# EAGLE board HPCTL Board (EAGLE 9.7.0)
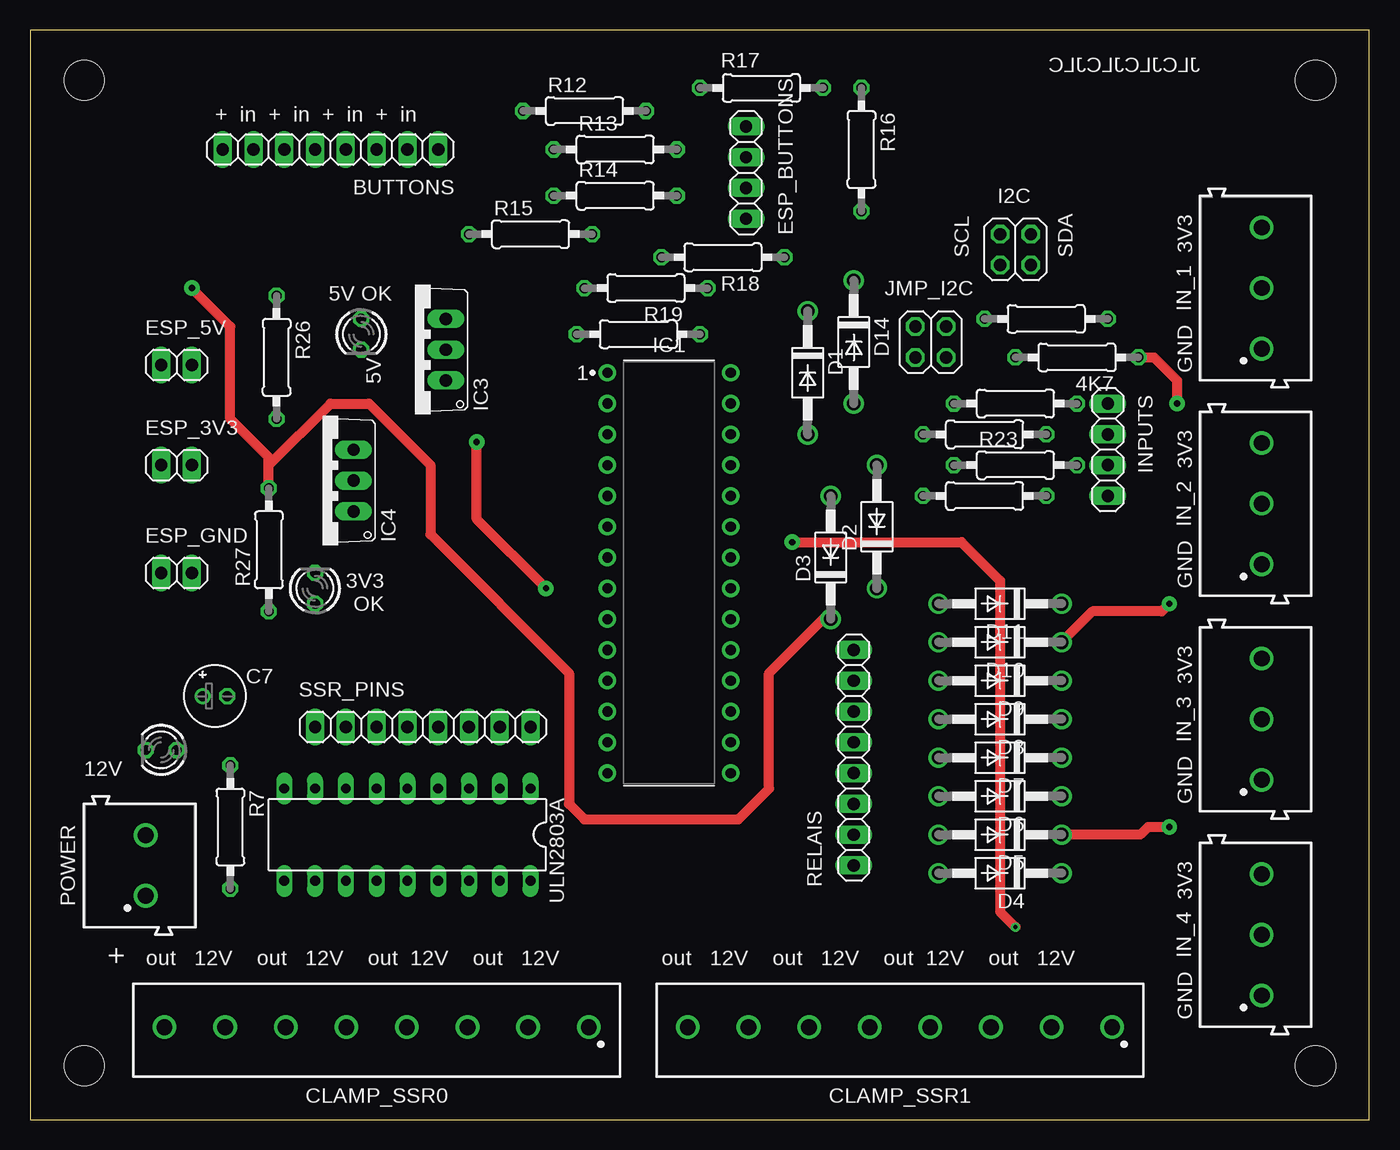
[diagram p0: board, top side]
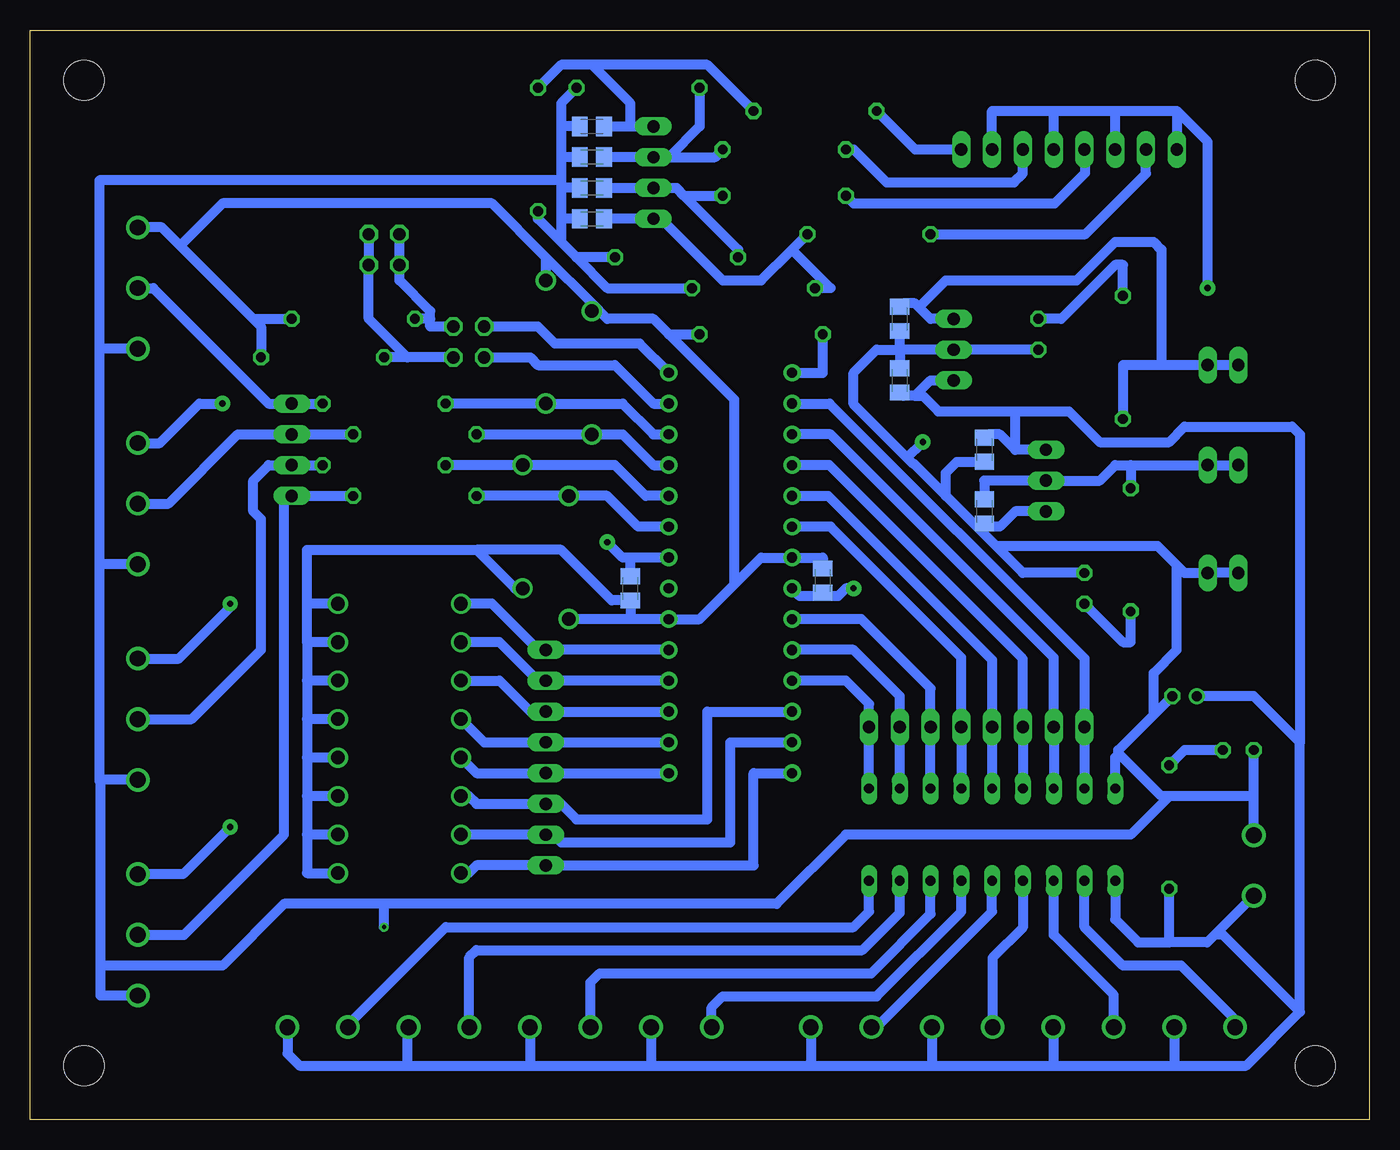
[diagram p1: board, bottom side, seen from below]

Size 110.47 x 89.84 mm. Coordinates in mm from the lower left corner, seen from the top.
Outline: 0,0 110.47,0 110.47,89.84 0,89.84 0,0
Copper layers (1*16): Top / Bottom
Stack-up Default Layer Stack: Top User Defined 0.035mm / Dielectric-1 User Defined 1.5mm / Bottom User Defined 0.035mm
Design rules "default": minimum track width 6mil, minimum drill 0.35mm, track to track 6mil, track to pad 6mil, pad to pad 6mil, via to via 6mil, smd to smd 6mil, copper to edge 40mil, drill to drill 6mil, minimum pad ring 10mil, minimum via ring 8mil, stop-mask expansion 4mil, vias tented up to drill 0mil, thermal gap 10mil
Holes 3.3 mm at 106.05,85.72 4.45,85.72 4.45,4.45 106.05,4.45

## Footprints (pad centres in the part's own frame; a part is rotated, then mirrored left to right if it is on the bottom)
0207/10 = drill 0.813 octagon: 1 -5.08,0; 2 5.08,0
LED3MM = drill 0.813 octagon: A -1.27,0; K 1.27,0
1X08 = drill 1.016 long: 1 -8.89,0; 2 -6.35,0; 3 -3.81,0; 4 -1.27,0; 5 1.27,0; 6 3.81,0; 7 6.35,0; 8 8.89,0
C0805K = smd 1.3 x 1.6: 1 -1,0; 2 1,0
E2-5 = drill 0.813 pad 1.27: + -1.016,0 | drill 0.813 pad 1.27 octagon: - 1.016,0
691135710008 = drill 1.3: 1 -17.5,0; 2 -12.5,0; 3 -7.5,0; 4 -2.5,0; 5 2.5,0; 6 7.5,0; 7 12.5,0; 8 17.5,0
DO41-10 = drill 1.118: A 5.08,0; C -5.08,0
1X02 = drill 1.016 long: 1 -1.27,0; 2 1.27,0
1X04 = drill 1.016 long: 1 -3.81,0; 2 -1.27,0; 3 1.27,0; 4 3.81,0
2X02 = drill 1.016 octagon: 1 -1.27,-1.27; 2 -1.27,1.27; 3 1.27,-1.27; 4 1.27,1.27
DIP1016W53P254L3467H457Q28B = drill 0.841 pad 1.441: 1 -5.08,16.51; 2 -5.08,13.97; 3 -5.08,11.43; 4 -5.08,8.89; 5 -5.08,6.35; 6 -5.08,3.81; 7 -5.08,1.27; 8 -5.08,-1.27; 9 -5.08,-3.81; 10 -5.08,-6.35; 11 -5.08,-8.89; 12 -5.08,-11.43; 13 -5.08,-13.97; 14 -5.08,-16.51; 15 5.08,-16.51; 16 5.08,-13.97; 17 5.08,-11.43; 18 5.08,-8.89; 19 5.08,-6.35; 20 5.08,-3.81; 21 5.08,-1.27; 22 5.08,1.27; 23 5.08,3.81; 24 5.08,6.35; 25 5.08,8.89; 26 5.08,11.43; 27 5.08,13.97; 28 5.08,16.51
TO220V = drill 1.016 long: 1 -2.54,-2.54; 2 0,-2.54; 3 2.54,-2.54
691101710003 = drill 1.3: 1 -5,0; 2 0,0; 3 5,0
691101710002 = drill 1.3: 1 -2.5,0; 2 2.5,0
DIL18 = drill 0.813 long: 1 -10.16,-3.81; 2 -7.62,-3.81; 3 -5.08,-3.81; 4 -2.54,-3.81; 5 0,-3.81; 6 2.54,-3.81; 7 5.08,-3.81; 8 7.62,-3.81; 9 10.16,-3.81; 10 10.16,3.81; 11 7.62,3.81; 12 5.08,3.81; 13 2.54,3.81; 14 0,3.81; 15 -2.54,3.81; 16 -5.08,3.81; 17 -7.62,3.81; 18 -10.16,3.81

## Placement (x,y rotation side)
4K7  [0207/10]  86.36,62.87 180 top
5V  TLLR4400  [LED3MM]  27.31,64.77 270 top
BUTTONS  PINHD-1X8  [1X08]  24.77,80.01 180 top
C1  0  [C0805K]  38.73,60.96 90 bottom
C2  0  [C0805K]  31.75,50.16 270 bottom
C3  220nF  [C0805K]  31.75,55.24 270 bottom
C4  100nF  [C0805K]  38.73,66.04 270 bottom
C5  10u  [C0805K]  64.14,81.92 0 bottom
C7  [E2-5]  15.24,34.92 0 top
C8  [C0805K]  60.96,43.81 90 bottom
C9  [C0805K]  45.09,44.45 270 bottom
C10  10u  [C0805K]  64.14,79.38 0 bottom
C11  10u  [C0805K]  64.14,76.83 180 bottom
C12  10u  [C0805K]  64.14,74.3 180 bottom
CLAMP_SSR0  691135710008  [691135710008]  28.57,7.62 180 top
CLAMP_SSR1  691135710008  [691135710008]  71.76,7.62 180 top
D1  UF4003  [DO41-10]  64.14,61.59 270 top
D2  UF4003  [DO41-10]  69.85,48.9 90 top
D3  UF4003  [DO41-10]  66.04,46.35 90 top
D4  UF4003  [DO41-10]  80.01,20.32 180 top
D5  UF4003  [DO41-10]  80.01,23.5 180 top
D6  UF4003  [DO41-10]  80.01,26.67 180 top
D7  UF4003  [DO41-10]  80.01,29.84 180 top
D8  UF4003  [DO41-10]  80.01,33.02 180 top
D9  UF4003  [DO41-10]  80.01,36.2 180 top
D10  UF4003  [DO41-10]  80.01,39.37 180 top
D11  UF4003  [DO41-10]  80.01,42.55 180 top
D14  UF4003  [DO41-10]  67.95,64.14 270 top
ESP_3V3  PINHD-1X2  [1X02]  12.07,53.98 0 top
ESP_5V  PINHD-1X2  [1X02]  12.07,62.23 0 top
ESP_BUTTONS  PINHD-1X4  [1X04]  59.06,78.11 90 top
ESP_GND  PINHD-1X2  [1X02]  12.07,45.09 0 top
I2C  PINHD-2X2  [2X02]  81.28,71.75 180 top
IC1  ATMEGA328  [DIP1016W53P254L3467H457Q28B]  52.7,45.09 0 top
IC3  LM7805_TO220V  [TO220V]  31.75,63.5 90 top
IC4  LD1117_TO220  [TO220V]  24.13,52.7 90 top
IN_1  691101710003  [691101710003]  101.6,68.58 90 top
IN_2  691101710003  [691101710003]  101.6,50.8 90 top
IN_3  691101710003  [691101710003]  101.6,33.02 90 top
IN_4  691101710003  [691101710003]  101.6,15.24 90 top
INPUTS  PINHD-1X4  [1X04]  88.9,55.24 270 top
JMP_I2C  PINHD-2X2  [2X02]  74.3,64.14 0 top
LED3  TLLR4400  [LED3MM]  23.5,43.81 90 top
LED17  TLLR4400  [LED3MM]  10.79,30.48 180 top
POWER  691101710002  [691101710002]  9.53,20.95 90 top
R7  [0207/10]  16.51,24.13 270 top
R12  1k  [0207/10]  45.72,83.19 0 top
R13  1k  [0207/10]  48.26,80.01 0 top
R14  1k  [0207/10]  48.26,76.2 0 top
R15  1k  [0207/10]  41.28,73.03 0 top
R16  10k  [0207/10]  68.58,80.01 270 top
R17  10k  [0207/10]  60.33,85.09 180 top
R18  10k  [0207/10]  57.15,71.12 180 top
R19  10k  [0207/10]  50.8,68.58 180 top
R20  4k7  [0207/10]  83.82,66.04 180 top
R22  1k  [0207/10]  78.74,51.44 0 top
R23  [0207/10]  81.28,53.98 0 top
R24  [0207/10]  78.74,56.52 0 top
R25  1k  [0207/10]  81.28,59.05 0 top
R26  [0207/10]  20.32,62.87 270 top
R27  [0207/10]  19.68,46.99 90 top
R28  10k  [0207/10]  50.17,64.77 180 top
RELAIS  PINHD-1X8  [1X08]  67.95,29.84 270 top
SSR_PINS  PINHD-1X8  [1X08]  32.39,32.38 0 top
ULN2803A  [DIL18]  31.11,23.5 180 top

## Library data of the parts
4K7 R7 R12-R20 R22-R28 = rcl; SPICEPREFIX: R
5V LED3 LED17 = led; MF: VISHAY SEMICONDUCTOR; OC_FARNELL: 1612437
BUTTONS ESP_BUTTONS I2C INPUTS JMP_I2C RELAIS SSR_PINS = Connector; CATEGORY: CONNECTOR; SUB-CATEGORY: PIN-HEADER
C1-C5 C7-C12 = rcl; SPICEPREFIX: C
CLAMP_SSR0 CLAMP_SSR1 = Wurth_Connectors_WR-TBL Wire Protector; DATASHEET-URL: https://www.we-online.com/catalog/datasheet/691135710008.pdf; IR-UL: 14A; IR-VDE: 13.5A; MOUNT: THT; PART-NUMBER: 691135710008; PINS: 8; PITCH: 5mm; TYPE: Horizontal; WIRE: 30 to 14 (AWG) 0.05 to 2.08 (mm²); WORKING-VOLTAGE-UL: 300V(AC); WORKING-VOLTAGE-VDE: 250V(AC)
D1-D11 D14 = diode
ESP_3V3 ESP_5V ESP_GND = Connector; CATEGORY: Headers; DESCRIPTION: Header, Straight, 2 Position; MANUFACTURER: Generic; MPN: Generic; OPERATING_TEMPERATURE: Generic; PART_STATUS: Active; PITCH: 0.100" (2.54mm); ROHS_COMPLIANCE: Generic; SERIES: Generic; SUB-CATEGORY: Headers, Male Pins; TYPE: Board to Board or Cable, Unshrouded, Through Hole, Straight
IC1 = IC_Embedded; CATEGORY: IC_Embedded; MANUFACTURER: Microchip Technologies; MPN: ATmega328-PN; OPERATING_TEMP: –40 to +105°C; PART_STATUS: Active; SUB-CATEGORY: Microcontroller
IC3 = IC_Power-Management; CATEGORY: IC_Linear; DESCRIPTION: 5V Voltage Regulator; MANUFACTURER: Generic; MPN: Generic; SERIES: LM7805; SUB-CATEGORY: Voltage Regulator; TYPE: 5V
IC4 = IC_Power-Management; CATEGORY: IC_Linear; DESCRIPTION: Adjustable voltage regulator; MANUFACTURER: STMicroelectronics; MPN: Generic; SERIES: LM1117; SUB-CATEGORY: Voltage Regulator; TYPE: Linear
IN_1-IN_4 = Wurth_Connectors_WR-TBL Wire Protector; DATASHEET-URL: https://www.we-online.com/catalog/datasheet/691101710003.pdf; IR-UL: 16A; IR-VDE: 16A; MOUNT: THT; PART-NUMBER: 691101710003; PINS: 3; PITCH: 5mm; TYPE: Horizontal; WIRE: 26 to 14 (AWG) 0.129 to 2.08 (mm²); WORKING-VOLTAGE-UL: 250V(AC); WORKING-VOLTAGE-VDE: 250V(AC)
POWER = Wurth_Connectors_WR-TBL Wire Protector; DATASHEET-URL: https://www.we-online.com/catalog/datasheet/691101710002.pdf; IR-UL: 16A; IR-VDE: 16A; MOUNT: THT; PART-NUMBER: 691101710002; PINS: 2; PITCH: 5mm; TYPE: Horizontal; WIRE: 26 to 14 (AWG) 0.129 to 2.08 (mm²); WORKING-VOLTAGE-UL: 250V(AC); WORKING-VOLTAGE-VDE: 250V(AC)
ULN2803A = uln-udn

## Nets
3V3: 4K7.1 BUTTONS.2 BUTTONS.4 BUTTONS.6 BUTTONS.8 C2.1 C8.1 C9.1 D1.C D2.C D3.C D4.C D5.C D6.C D7.C D8.C D9.C D10.C D11.C D14.C ESP_3V3.1 ESP_3V3.2 IC1.7 IC1.20 IC4.2 IN_1.3 IN_2.3 IN_3.3 IN_4.3 R20.1 R27.2 R28.1
5V: C4.1 ESP_5V.1 ESP_5V.2 IC3.3 R26.2
12V: C1.1 C3.1 C7.+ CLAMP_SSR0.1 CLAMP_SSR0.3 CLAMP_SSR0.5 CLAMP_SSR0.7 CLAMP_SSR1.1 CLAMP_SSR1.3 CLAMP_SSR1.5 CLAMP_SSR1.7 IC3.1 IC4.3 POWER.1 R7.2 ULN2803A.10
GND: 5V.K C1.2 C2.2 C3.2 C4.2 C5.1 C7.- C8.2 C9.2 C10.1 C11.2 C12.2 ESP_GND.1 ESP_GND.2 IC1.8 IC1.22 IC3.2 IC4.1 IN_1.1 IN_2.1 IN_3.1 IN_4.1 LED3.K LED17.K POWER.2 R16.2 R17.1 R18.1 R19.1 ULN2803A.9
IN0: D3.A IC1.23 R22.1
IN1: D2.A IC1.24 R23.1
IN2: D1.A IC1.25 R24.1
IN3: D14.A IC1.26 R25.1
N$1: I2C.3 I2C.4 JMP_I2C.4 R20.2
N$2: 4K7.2 I2C.1 I2C.2 JMP_I2C.3
N$5: BUTTONS.7 R15.1
N$6: BUTTONS.5 R14.1
N$7: BUTTONS.3 R13.1
N$8: BUTTONS.1 R12.1
N$9: LED17.A R7.1
N$18: CLAMP_SSR0.8 ULN2803A.11
N$19: CLAMP_SSR0.6 ULN2803A.12
N$20: CLAMP_SSR0.4 ULN2803A.13
N$21: CLAMP_SSR0.2 ULN2803A.14
N$22: CLAMP_SSR1.8 ULN2803A.15
N$23: CLAMP_SSR1.6 ULN2803A.16
N$24: CLAMP_SSR1.4 ULN2803A.17
N$25: CLAMP_SSR1.2 ULN2803A.18
N$34: C5.2 ESP_BUTTONS.4 R12.2 R16.1
N$35: C12.1 ESP_BUTTONS.1 R15.2 R19.2
N$36: C11.1 ESP_BUTTONS.2 R14.2 R18.2
N$37: IN_4.2 INPUTS.4 R22.2
N$38: C10.2 ESP_BUTTONS.3 R13.2 R17.2
N$39: IN_3.2 INPUTS.3 R23.2
N$40: IN_2.2 INPUTS.2 R24.2
N$41: IN_1.2 INPUTS.1 R25.2
N$43: IC1.21
N$46: 5V.A R26.1
N$47: LED3.A R27.1
N$50: IC1.1 R28.2
R0: D4.A IC1.14 RELAIS.8
R1: D5.A IC1.13 RELAIS.7
R2: D6.A IC1.12 RELAIS.6
R3: D7.A IC1.15 RELAIS.5
R4: D8.A IC1.16 RELAIS.4
R5: D9.A IC1.17 RELAIS.3
R6: D10.A IC1.18 RELAIS.2
R7: D11.A IC1.19 RELAIS.1
SCL: IC1.28 JMP_I2C.2
SDA: IC1.27 JMP_I2C.1
SSR0: IC1.2 SSR_PINS.1 ULN2803A.8
SSR1: IC1.3 SSR_PINS.2 ULN2803A.7
SSR2: IC1.4 SSR_PINS.3 ULN2803A.6
SSR3: IC1.5 SSR_PINS.4 ULN2803A.5
SSR4: IC1.6 SSR_PINS.5 ULN2803A.4
SSR5: IC1.9 SSR_PINS.6 ULN2803A.3
SSR6: IC1.10 SSR_PINS.7 ULN2803A.2
SSR7: IC1.11 SSR_PINS.8 ULN2803A.1

## Tracks (layer width: path | path; a pad name or v marks a point on that pad's centre or on a via)
3V3  (via drill 0.51 pad 1.27)
  Top 0.813: 4K7.1 92.71,62.87 94.62,60.96 v94.62,59.05 | v13.34,68.58 16.51,65.41 16.51,57.78 19.68,54.61 19.68,53.98 | R27.2 19.68,53.98 | 19.68,53.98 24.77,59.05 27.94,59.05 33.02,53.98 33.02,48.26 44.45,36.83 44.45,26.04 45.72,24.77 58.42,24.77 60.96,27.3 60.96,36.83 65.41,41.27 D3.C | D10.C 87.63,41.91 93.34,41.91 v93.98,42.55 | D5.C 91.57,23.5 92.21,24.13 v93.98,24.13
  Bottom 0.813: D11.C 87.63,42.55 | 87.63,39.37 87.63,42.55 | 87.63,39.37 87.63,36.2 | 87.63,36.2 87.63,33.02 | 87.63,33.02 87.63,29.84 | 87.63,29.84 87.63,26.67 | 87.63,26.67 87.63,23.5 | 87.63,23.5 87.63,20.32 D4.C | D5.C 87.63,23.5 | D6.C 87.63,26.67 | D7.C 87.63,29.84 | D8.C 87.63,33.02 | D9.C 87.63,36.2 | D10.C 87.63,39.37 | C9.1 45.09,46.35 IC1.7 50.17,46.35 52.39,44.13 | 60.96,41.27 IC1.20 55.25,41.27 52.39,44.13 | 60.96,41.27 D3.C | 60.96,41.27 C8.1 62.5,42.81 66.68,46.99 73.66,46.99 | 87.63,42.55 87.63,46.99 73.66,46.99 | 73.66,46.99 70.48,43.81 D2.C | 4K7.1 91.44,65.41 92.08,66.04 | 92.08,66.04 R20.1 | 98.11,72.07 92.08,66.04 | 98.11,72.07 99.61,73.58 IN_1.3 | 67.95,71.12 64.14,67.31 | 64.14,67.31 D1.C | 67.95,71.12 72.39,75.56 94.62,75.56 98.11,72.07 | 67.95,71.12 D14.C | 52.39,44.13 52.39,59.37 57.79,64.77 | 57.79,64.77 R28.1 | 57.79,64.77 59.06,66.04 62.87,66.04 64.14,67.31 | C2.1 31.75,52.7 IC4.2 22.23,52.7 20.96,53.98 19.68,53.98 | 19.68,53.98 ESP_3V3.2 ESP_3V3.1 | 19.68,53.98 R27.2 | v94.62,59.05 96.52,59.05 99.77,55.8 IN_2.3 | IN_4.3 97.87,20.24 v93.98,24.13 | BUTTONS.2 31.11,83.19 26.04,83.19 | 26.04,83.19 20.96,83.19 | 20.96,83.19 15.88,83.19 | 15.88,83.19 BUTTONS.8 | BUTTONS.6 20.96,83.19 | BUTTONS.4 26.04,83.19 | v13.34,68.58 13.34,80.64 15.88,83.19 | IN_3.3 98.22,38.02 93.98,42.26 v93.98,42.55
5V
  Bottom 0.813: IC3.3 36.2,66.04 37.15,66.99 | 37.15,66.99 37.47,67.31 38.47,67.31 C4.1 | 37.15,66.99 34.93,69.22 24.13,69.22 20.96,72.39 17.78,72.39 17.14,71.75 17.14,62.23 | R26.2 20.32,62.23 17.14,62.23 | ESP_5V.1 ESP_5V.2 17.14,62.23
12V
  Bottom 0.813: ULN2803A.10 20.96,16.51 19.05,14.61 16.51,14.61 | 16.51,14.61 R7.2 | POWER.1 12.72,15.26 | 12.72,15.26 13.38,14.61 16.51,14.61 | CLAMP_SSR1.1 89.26,5.43 88.27,4.45 79.38,4.45 | 79.38,4.45 69.22,4.45 | 69.22,4.45 59.06,4.45 | 59.06,4.45 46.36,4.45 | 46.36,4.45 36.2,4.45 | 36.2,4.45 26.04,4.45 | 26.04,4.45 15.88,4.45 | 15.88,4.45 10.16,4.45 5.71,8.89 | 5.71,8.89 12.09,15.26 12.72,15.26 | CLAMP_SSR0.7 16.07,4.64 15.88,4.45 | CLAMP_SSR0.5 26.07,4.49 26.04,4.45 | CLAMP_SSR0.3 36.08,4.57 36.2,4.45 | CLAMP_SSR0.1 46.08,4.72 46.36,4.45 | CLAMP_SSR1.7 59.26,4.64 59.06,4.45 | CLAMP_SSR1.5 69.26,4.49 69.22,4.45 | CLAMP_SSR1.3 79.38,7.5 79.38,4.45 | 5.71,8.89 5.71,31.11 | 5.71,31.11 9.53,34.92 C7.+ | IC3.1 36.2,60.96 37.47,59.69 | 37.47,59.69 38.47,59.69 C1.1 | IC4.3 29.21,55.24 | 29.21,55.24 30.48,56.52 31.48,56.52 C3.1 | 37.47,59.69 36.83,59.69 35.56,58.42 29.21,58.42 | 29.21,58.42 24.77,58.42 22.23,55.88 16.51,55.88 15.24,57.15 6.35,57.15 5.71,56.52 5.71,31.11 | 29.21,55.24 29.21,58.42
GND  (via drill 0.35, 0.51 pad 1.27)
  Top 0.813: v42.55,43.81 36.83,49.53 v36.83,55.88 | v62.87,47.62 76.84,47.62 80.01,44.45 80.01,17.14 v81.28,15.88
  Bottom 0.813: C9.2 45.09,43.18 | 45.09,43.18 46.99,43.18 IC1.8 | POWER.2 9.53,26.67 | 9.53,26.67 LED17.K | ULN2803A.9 20.96,29.84 20.7,30.1 | 20.7,30.1 20.64,30.16 17.14,26.67 16.51,26.67 | 17.78,33.4 20.7,30.48 20.7,30.1 | 17.78,33.4 C7.- | C8.2 60.96,46.35 | IC1.22 60.96,46.35 | 9.53,26.67 16.51,26.67 | C5.1 66.68,81.92 | 66.68,81.92 66.68,79.38 | 66.68,79.38 66.68,77.47 | 66.68,77.47 66.68,76.83 | 66.68,76.83 66.68,74.3 | 66.68,74.3 66.68,72.39 | R16.2 68.58,74.3 66.68,72.39 | C10.1 66.68,79.38 | C11.2 66.68,76.83 | C12.2 66.68,74.3 | R19.1 62.87,68.58 65.41,71.12 | 66.68,72.39 65.41,71.12 | R18.1 65.41,71.12 | R17.1 66.68,83.82 66.68,81.92 | 66.68,77.47 104.77,77.47 104.77,63.5 | 104.77,63.5 104.77,45.72 | 104.77,45.72 104.77,27.94 104.7,28.02 | 104.7,28.02 104.7,12.7 | IN_3.1 104.7,28.02 | IN_2.1 104.7,45.8 104.77,45.72 | IN_1.1 104.7,63.58 104.77,63.5 | 38.73,63.5 IC3.2 5V.K | 38.73,63.5 C4.2 | 38.73,63.5 C1.2 | IC4.1 29.21,50.16 30.48,48.9 31.48,48.9 C2.2 32.66,49.16 | 32.66,49.16 34.93,51.44 | 34.93,51.44 34.93,53.34 34.02,54.24 C3.2 | LED3.K 28.57,45.09 30.8,47.31 | 30.8,47.31 32.66,49.16 | ESP_GND.1 ESP_GND.2 15.24,45.09 15.88,45.72 | 30.8,47.31 17.46,47.31 15.88,45.72 | 38.73,63.5 40.64,63.5 42.55,61.59 42.55,59.01 38.12,54.59 | 17.78,33.4 17.78,36.83 15.88,38.73 15.88,45.72 | 60.96,46.35 61.59,46.35 v62.87,47.62 | v42.55,43.81 43.18,43.81 43.82,43.18 45.09,43.18 | 34.93,51.44 37.54,54.05 37.59,54.05 38.12,54.59 | 38.12,54.59 v36.83,55.88 | 16.51,26.67 19.68,23.5 43.18,23.5 48.9,17.78 81.28,17.78 | 81.28,17.78 89.54,17.78 94.62,12.7 104.7,12.7 | 104.7,12.7 104.7,10.24 IN_4.1 | v81.28,15.88 81.28,17.78
IN0
  Bottom 0.813: IC1.23 60.33,48.9 62.87,51.44 D3.A R22.1
IN1
  Bottom 0.813: R23.1 D2.A 62.23,53.98 59.69,51.44 IC1.24
IN2
  Bottom 0.813: R24.1 D1.A 61.59,56.52 59.06,53.98 IC1.25
IN3
  Bottom 0.813: IC1.26 59.06,56.52 61.59,59.05 D14.A R25.1
N$1
  Bottom 0.813: JMP_I2C.4 77.47,65.41 77.47,66.04 | 77.47,66.04 R20.2 | 77.47,66.04 77.47,66.67 80.01,69.22 I2C.4 I2C.3
N$2
  Bottom 0.813: JMP_I2C.3 79.38,62.87 | 79.38,62.87 4K7.2 | I2C.1 I2C.2 82.55,66.04 79.38,62.87
N$5
  Bottom 0.813: R15.1 23.4,73.03 18.42,78.01 BUTTONS.7
N$6
  Bottom 0.813: R14.1 42.55,75.56 25.95,75.56 23.44,78.07 23.44,79.96 BUTTONS.5
N$7
  Bottom 0.813: R13.1 42.55,80.01 39.83,77.29 29.3,77.29 28.57,78.02 BUTTONS.3
N$8
  Bottom 0.813: R12.1 37.47,80.01 BUTTONS.1
N$9
  Bottom 0.813: LED17.A 15.24,30.48 R7.1
N$18
  Bottom 0.813: CLAMP_SSR0.8 11.07,8.26 15.52,12.7 20.32,12.7 23.5,15.88 ULN2803A.11
N$19
  Bottom 0.813: CLAMP_SSR0.6 21.07,10.28 26.04,15.24 ULN2803A.12
N$20
  Bottom 0.813: ULN2803A.13 28.57,15.84 31.07,13.34 CLAMP_SSR0.4
N$21
  Bottom 0.813: CLAMP_SSR0.2 40.64,7.62 31.11,17.14 ULN2803A.14
N$22
  Bottom 0.813: CLAMP_SSR1.8 54.26,9.24 53.34,10.16 40.64,10.16 33.66,17.14 ULN2803A.15
N$23
  Bottom 0.813: CLAMP_SSR1.6 64.26,11.31 63.5,12.06 41.09,12.06 36.2,16.95 ULN2803A.16
N$24
  Bottom 0.813: CLAMP_SSR1.4 74.26,13.38 73.66,13.97 41.82,13.97 38.73,17.05 ULN2803A.17
N$25
  Bottom 0.813: CLAMP_SSR1.2 84.26,7.82 76.2,15.88 42.55,15.88 41.28,17.14 ULN2803A.18
N$34
  Bottom 0.813: C5.2 60.96,81.92 | 60.96,81.92 ESP_BUTTONS.4 | 60.96,81.92 60.96,83.82 64.14,87 | 64.14,87 66.68,87 R16.1 | R12.2 54.61,87 64.14,87
N$35
  Bottom 0.813: C12.1 ESP_BUTTONS.1 58.42,74.3 53.34,69.22 50.17,69.22 47.62,71.75 | 47.62,71.75 44.45,68.58 R19.2 | R15.2 47.62,71.75
N$36
  Bottom 0.813: C11.1 ESP_BUTTONS.2 57.15,76.83 56.52,76.2 | 56.52,76.2 R14.2 | 56.52,76.2 52.07,71.75 R18.2
N$37
  Bottom 0.813: IN_4.2 97.79,15.24 89.54,23.5 89.54,51.44 INPUTS.4 R22.2
N$38
  Bottom 0.813: C10.2 ESP_BUTTONS.3 57.79,79.38 | 57.79,79.38 53.98,79.38 R13.2 | R17.2 55.25,81.92 57.79,79.38
N$39
  Bottom 0.813: IN_3.2 97.16,33.02 91.44,38.73 91.44,49.53 92.08,50.16 92.08,52.7 90.81,53.98 INPUTS.3 R23.2
N$40
  Bottom 0.813: IN_2.2 99.06,50.8 93.34,56.52 INPUTS.2 R24.2
N$41
  Bottom 0.813: IN_1.2 100.33,68.58 90.81,59.05 INPUTS.1 R25.2
N$46
  Bottom 0.813: R26.1 20.32,70.48 20.96,70.48 25.4,66.04 5V.A
N$47
  Bottom 0.813: LED3.A 20.32,39.37 19.68,39.37 R27.1
N$50
  Bottom 0.813: IC1.1 45.09,61.59 R28.2
R0
  Bottom 0.813: D4.A 74.3,20.32 73.66,20.95 RELAIS.8 50.8,20.95 50.8,28.57 IC1.14
R1
  Bottom 0.813: D5.A RELAIS.7 67.31,23.5 66.68,22.86 52.7,22.86 52.7,31.11 IC1.13
R2
  Bottom 0.813: D6.A 74.3,26.67 73.66,26.04 RELAIS.6 66.68,26.04 65.41,24.77 54.61,24.77 54.61,33.66 IC1.12
R3
  Bottom 0.813: D7.A 73.66,28.57 RELAIS.5 IC1.15
R4
  Bottom 0.813: IC1.16 RELAIS.4 73.03,31.11 D8.A
R5
  Bottom 0.813: IC1.17 RELAIS.3 69.22,33.66 71.76,36.2 D9.A
R6
  Bottom 0.813: D10.A 71.76,39.37 68.58,36.2 RELAIS.2 IC1.18
R7
  Bottom 0.813: D11.A 72.39,42.55 68.58,38.73 RELAIS.1 IC1.19
SCL
  Bottom 0.813: IC1.28 60.2,64.01 67.18,64.01 68.58,65.41 JMP_I2C.2
SDA
  Bottom 0.813: IC1.27 59.06,59.05 62.23,62.23 68.58,62.23 69.22,62.87 JMP_I2C.1
SSR0
  Bottom 0.813: ULN2803A.8 SSR_PINS.1 23.5,38.03 44.52,59.05 IC1.2
SSR1
  Bottom 0.813: ULN2803A.7 SSR_PINS.2 26.04,38.1 44.45,56.52 IC1.3
SSR2
  Bottom 0.813: ULN2803A.6 SSR_PINS.3 28.57,38.01 44.55,53.98 IC1.4
SSR3
  Bottom 0.813: ULN2803A.5 SSR_PINS.4 31.11,37.91 44.64,51.44 IC1.5
SSR4
  Bottom 0.813: ULN2803A.4 SSR_PINS.5 33.66,38.1 44.45,48.9 IC1.6
SSR5
  Bottom 0.813: ULN2803A.3 SSR_PINS.6 36.2,35.56 41.91,41.27 IC1.9
SSR6
  Bottom 0.813: ULN2803A.2 SSR_PINS.7 38.73,34.92 42.55,38.73 IC1.10
SSR7
  Bottom 0.813: ULN2803A.1 SSR_PINS.8 41.28,34.29 43.18,36.2 IC1.11

## Text on the board
tNames: JLCJLCJLCJLC | + in + in + in + in | SCL | SDA | 5V OK | GND 3V3 | 1 | 3V3 / OK | GND 3V3 | 12V | GND 3V3 | + | out 12V out 12V out 12V out 12V | out 12V out 12V out 12V out 12V | GND 3V3